# Altium PCB TestBoard_Rev13.PcbDoc
Units mil, origin at the board's own origin, x right, y up, seen from the top; angles counter-clockwise.
Board outline 2110 x 1040 mil, 2 copper layers (Top Layer, Bottom Layer), stack 31.8 mil thick; 62 components, 41 nets, 254 pads, 82 vias.
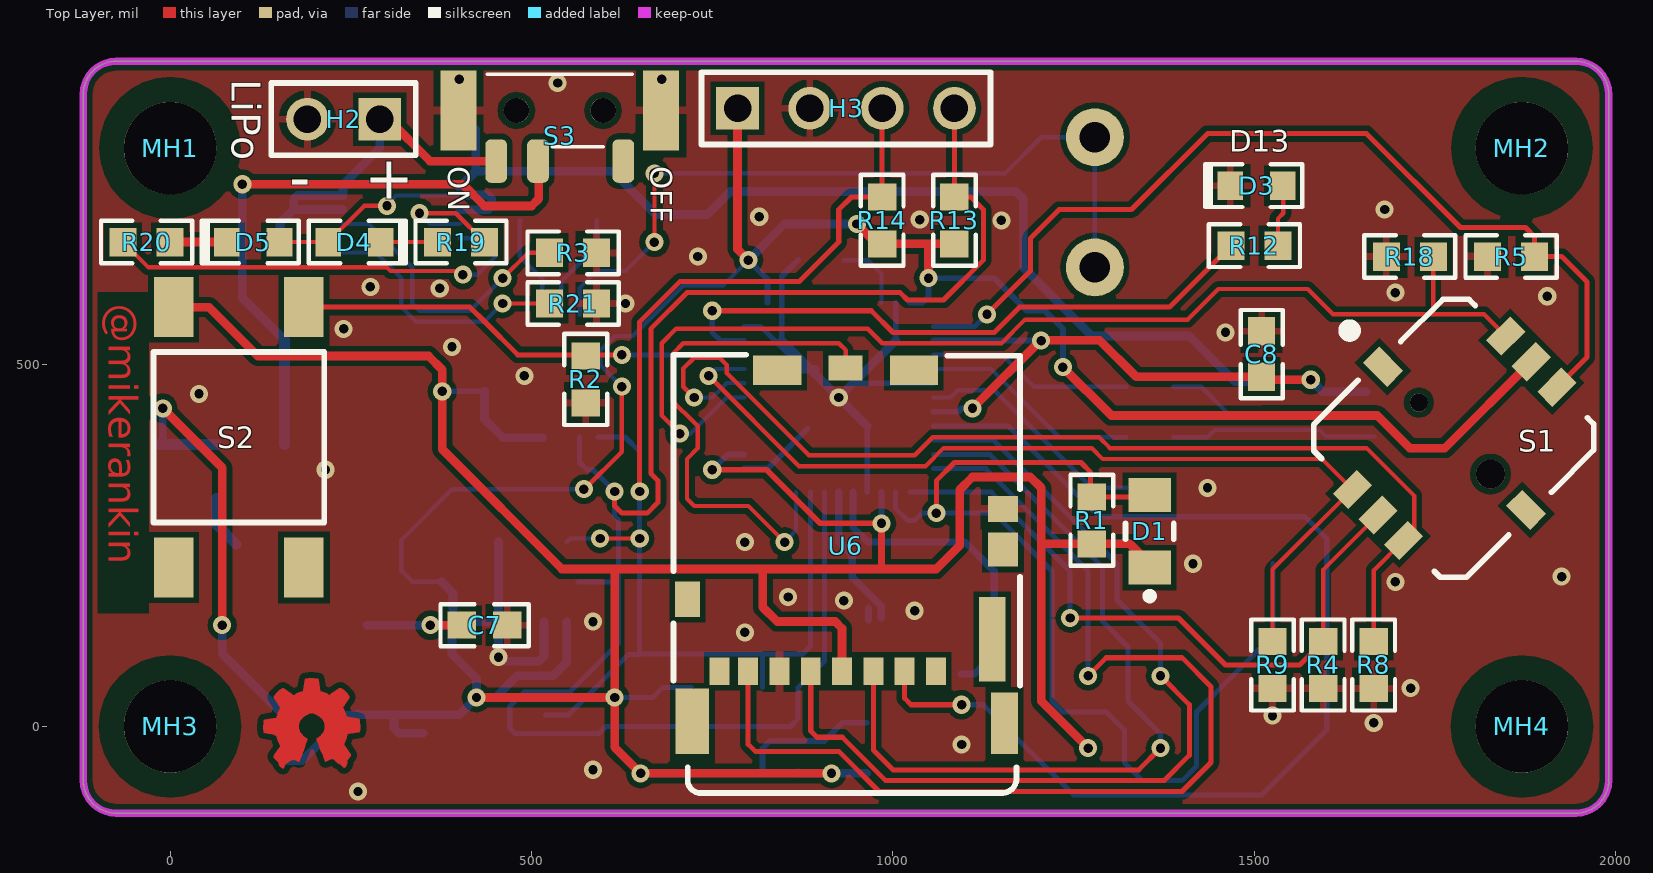
[diagram p0: Top Layer view]
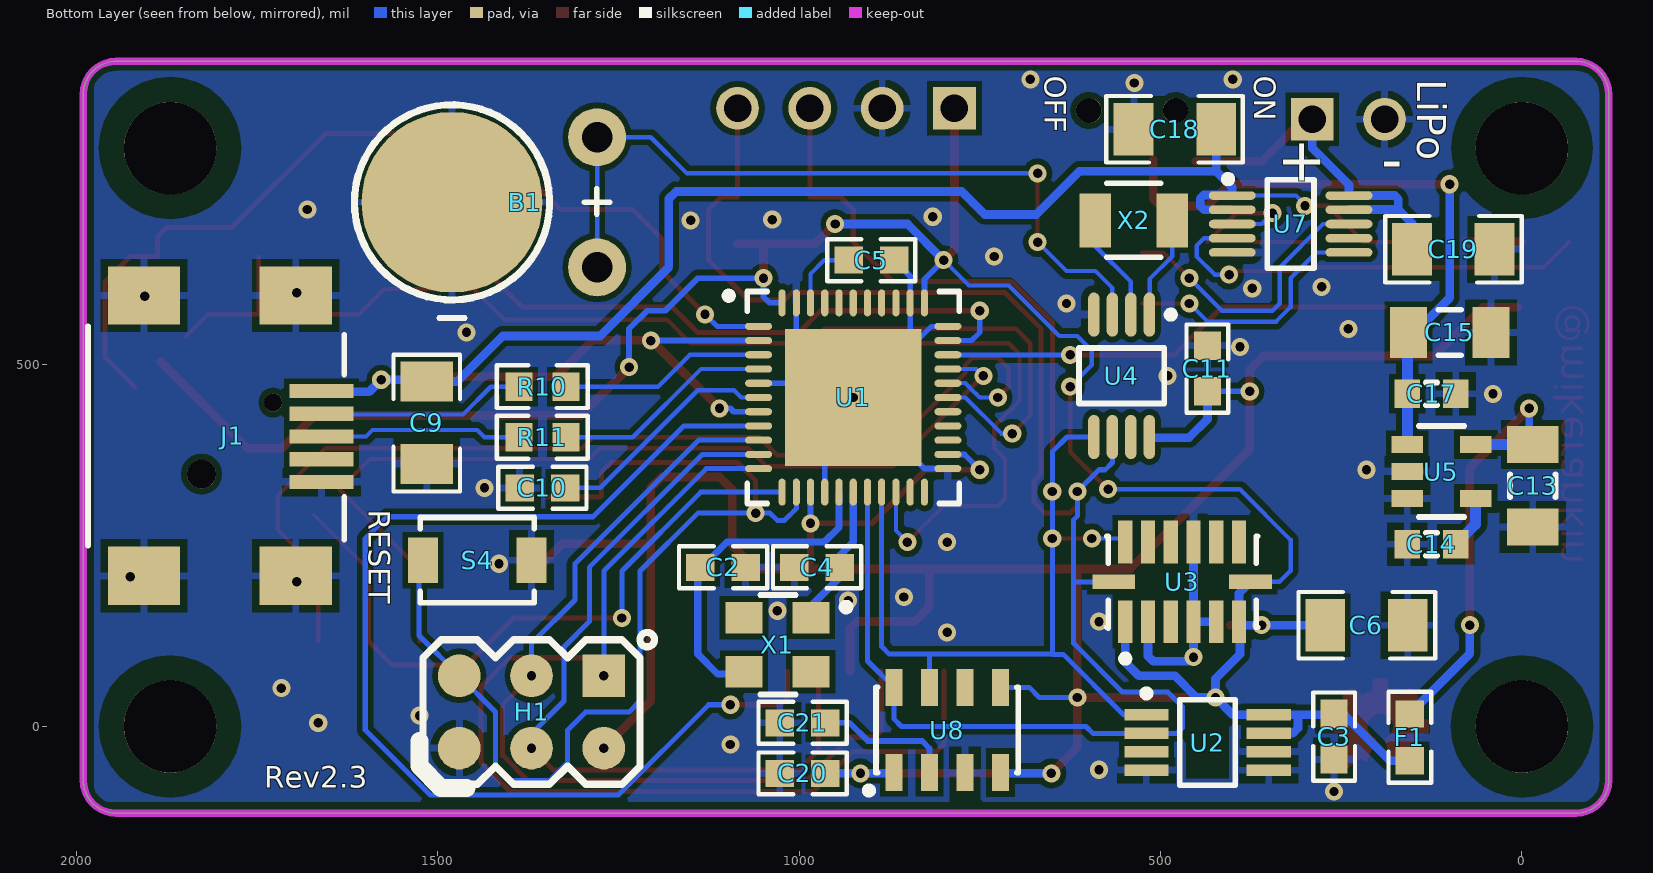
[diagram p1: Bottom Layer view, seen from below]
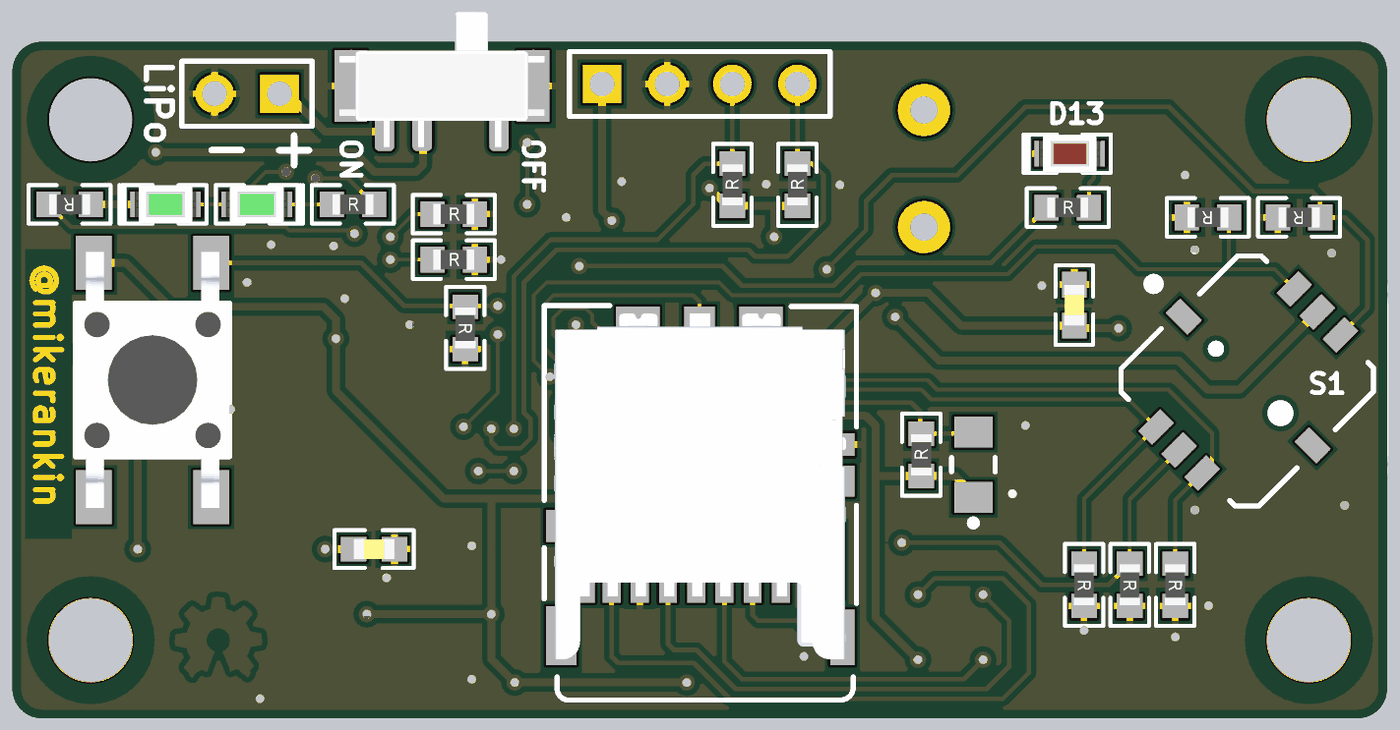
[diagram p2: 3D render of the assembled board from above, using the file's embedded part models]
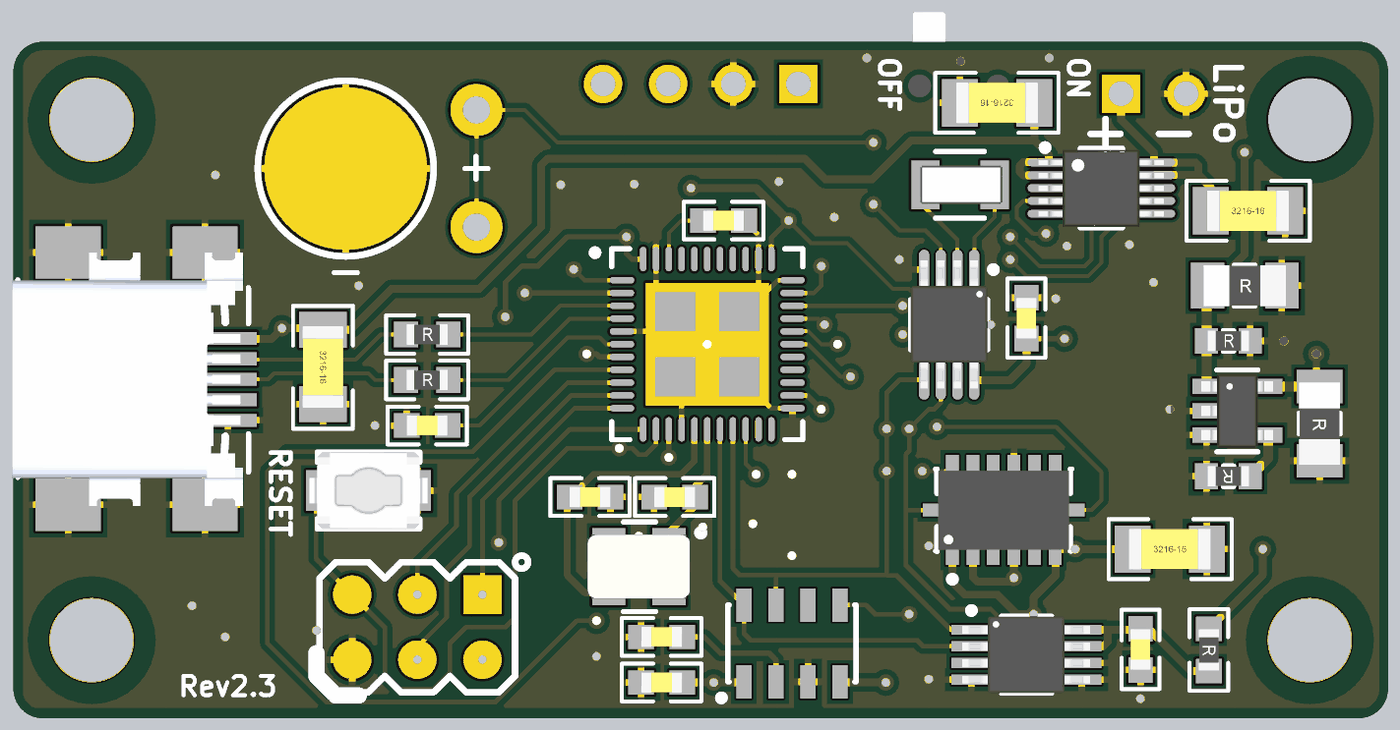
[diagram p3: 3D render of the assembled board from below, using the file's embedded part models]

## Layer stack, top to bottom
Top Solder: solder mask 0.4, Solder Resist, Dk 3.5
Top Layer: signal copper 1.4
Dielectric1: core 29, FR-4, Dk 4.8
Bottom Layer: signal copper 1.4
Bottom Solder: solder mask 0.4, Solder Resist, Dk 3.5

## Board outline
-120,-75 -120,875 cw(c-75,875) -75,920 1945,920 cw(c1945,875) 1990,875 1990,-75 cw(c1945,-75) 1945,-120 -75,-120 cw(c-75,-75)

## Design rules (kind name [scope] priority, off if disabled: settings)
Clearance Clearance_TSSOP [HasFootprint('TSSOP50P490X110-10N')] p1: gap=7.5
Clearance [All] p2: gap=8
HoleSize [All] p1: absolutevalues=TRUE maxlimit=130 minlimit=1 maxpercent=80.000 minpercent=20.000
MinimumSolderMaskSliver [All] p1 off: minsoldermaskwidth=5
PlaneConnect "Via No Relief" [(Isvia)] p1: planeconnectstyle=Direct reliefexpansion=20 reliefentries=4 reliefconductorwidth=10 reliefairgap=10
PlaneConnect [All] p2: planeconnectstyle=Relief reliefexpansion=20 reliefentries=4 reliefconductorwidth=10 reliefairgap=10
PolygonConnect Via_No_Relief [(IsVia)] p1: connectstyle=Direct reliefconductorwidth=10 reliefentries=4 polygonreliefangle="90 Angle" airgapwidth=10
PolygonConnect [All] p2: connectstyle=Relief reliefconductorwidth=10 reliefentries=4 polygonreliefangle="90 Angle" airgapwidth=10
RoutingVias [All] p1: holewidth=13 width=25 viastyle="Through Hole" minholewidth=13 minwidth=25 maxholewidth=13 maxwidth=25
SilkToSilkClearance [All] p1: silktosilkclearance=7
SilkToSolderMaskClearance SilkscreenOverComponentPads [IsPad] p1 off: minsilkscreentomaskgap=10 clearancetoexposedcopper=TRUE
SolderMaskExpansion [All] p1: expansion=4
Width [All] p1: maxlimit=50 minlimit=6 preferedwidth=7 minimp=50.000000 maximp=50.000000 favimp=50.000000
24 further rules are at their usual default settings.

## Components (designator, comment, footprint, x,y, rotation, side; value= is the part's Value field where it differs from the comment)
B1 "CR377" "CR377 Mount" 1480,725 r0 bottom
C2 "18pF" CAPC1608X90N 1105,220 r0 bottom
C3 "0.1uF" CAPC1608X90N 259.84,-14.13 r270 bottom
C4 "18pF" CAPC1608X90N 975,220 r180 bottom
C5 "0.1uF" CAPC1608X90N 900,645 r180 bottom
C6 "10uF" CAPC3216X160N 215,140 r180 bottom
C7 "0.1uF" CAPC1608X90N 435,140 r0 top
C8 "0.1uF" CAPC1608X90N 1510,515 r90 top
C9 "10uF" CAPC3216X160N 1515,420 r270 bottom
C10 "1uF" CAPC1608X90N 1355,330 r0 bottom
C11 "0.1uF" CAPC1608X90N 435,495 r90 bottom
C13 "CAP_1206" CHIP_3216N -15,332.91 r270 bottom
C14 "0.1uF" CHIP_1608N 125,252 r0 bottom
C15 "CAP_1206" CHIP_3216N 100,545 r180 bottom
C17 "0.1uF" CHIP_1608N 125,460 r180 bottom
C18 "4.7uF" CAPC3216X160N 480,826 r0 bottom
C19 "4.7uF" CAPC3216X160N 95,660 r180 bottom
C20 "0.1uF" CAPC1608X90N 995,-65 r0 bottom
C21 "1uF" CAPC1608X90N 995,5 r0 bottom
D1 "CD1206-S01575" BOUR-CD1206-S01575-2_L 1355,269.8 r270 top
D3 "Amber LED" LED1608X55N-RED 1503,748 r0 top
D4 "LED_0603" LED1608X55N-GREEN 255,670 r180 top
D5 "LED_0603" LED1608X55N-GREEN 115,670 r0 top
F1 "300mA Fuse" RESC1608X55N 155,-15 r270 bottom
H1 "CON3X2" HDR3X2 1370,20 r0 bottom
H2 "TSW-102-07-L-S" HDR1X2 240,840 r180 top
H3 "CON4" HDR1X4-Empty 935,855 r0 top
J1 "USB_DX" USB_DX 1766,401 r180 bottom
MH1 "Mounting Hole" "MH - 128mil Hole, 250mil Pad"#1 0,800 r0 top
MH2 "Mounting Hole" "MH - 128mil Hole, 250mil Pad"#2 1870,800 r0 top
MH3 "Mounting Hole" "MH - 128mil Hole, 250mil Pad"#2 0,0 r0 top
MH4 "Mounting Hole" "MH - 128mil Hole, 250mil Pad"#2 1870,0 r0 top
R1 "10K" RESC1608X55N 1275,285 r90 top
R2 "10K" RESC1608X55N 575,480 r270 top
R3 "10K" RESC1608X55N 557.48,655 r0 top
R4 "10K" RESC1608X55N 1595,85 r270 top
R5 "10K" RESC1608X55N 1855,650 r180 top
R8 "10K" RESC1608X55N 1665,85 r270 top
R9 "10K" RESC1608X55N 1525,85 r270 top
R10 "22R" RESC1608X55N 1355,470 r180 bottom
R11 "22R" RESC1608X55N 1355,400 r180 bottom
R12 "1K" RESC1608X55N 1500,665 r0 top
R13 "4.7K" RESC1608X55N 1085,700 r90 top
R14 "4.7K" RESC1608X55N 985,700 r90 top
R18 "10K" RESC1608X55N 1715,650 r180 top
R19 "470R" RESC1608X55N 402.48,670 r0 top
R20 "470R" RESC1608X55N -32.48,670 r180 top
R21 "1K" RESC1608X55N 557.48,585 r0 top
S1 "Navigation Switch" "NAVIGATION - DX" 1775,400 r0 top
S2 "Tactile_Switch" FSM6JSMA 95,400 r0 top
S3 "" SLIDE_SWITCH_DX 539,852 r180 top
S4 "TL1015AF160QG" TL1015AF160QG 1445,230 r0 bottom
U1 "ATmega32U4" VQFN-44 925,455 r180 bottom
U2 "TMP75AIDGKR" "MSOP-8N - NOPAD" 434.84,-22.32 r180 bottom
U3 "ADXL345BCCZ-RL7" LGA80P300X500X100-14N 470,200 r90 bottom
U4 "DS1340Z-33+" TSOP65P490X110-8N 553.7,485 r270 bottom
U5 "TPS79133DBVR" SOT95P280X144-5N 111.24,352.6 r180 bottom
U6 "Micro SD Connector" 5040771891 935,250 r180 top
U7 "MCP73833-FCI/UN" TSSOP50P490X110-10N 320,695 r180 bottom
U8 "MPL115A2" 8-LGA 795,-5 r90 bottom
X1 "16Mhz" OSC320X250X75-4N 1030,113 r270 bottom
X2 "ECS-.327-12.5-34B" ECS-.327-12.5-34B 535,700 r0 bottom

## Footprints (in the part's own frame and the unit in brackets; to place one, negate y for a bottom-side part, rotate by r counter-clockwise, add the part's x,y. Pads: shape width x height; smd on the part's side, far side on the other; paste and mask are expansions set on the pad)
8-LGA [mm] "LGA, 8-Pins"
  rect 1.3x0.6 smd mask+0.076: 1(-1.5,1.875) 2(-1.5,0.625) 3(-1.5,-0.625) 4(-1.5,-1.875) 5(1.5,-1.875) 6(1.5,-0.625) 7(1.5,0.625) 8(1.5,1.875)
  silkscreen extent -2.25,-2.5 1.5,2.88
5040771891 [mm] "CONN MICRO SD CARD PUSH-PULL SMD"
  rect 0.7x0.95 smd: 1(-3.162,4.413) 2(-2.062,4.413) 3(-0.962,4.413) 4(0.138,4.413) 5(1.238,4.413) 6(2.338,4.413) 7(3.438,4.413) 8(4.438,4.413)
  rect 1.2x0.88 smd: 9(0.013,-6.237)
  rect 0.95x2.17 smd: ""(-5.562,6.238)
  rect 1.05x0.9 smd: ""(-5.512,-1.287)
  rect 1.05x1.2 smd: ""(-5.512,0.138)
  rect 0.93x2.97 smd: ""(-5.137,3.288)
  rect 1.7x1.03 smd: ""(-2.387,-6.162) ""(2.413,-6.162)
  rect 1.19x2.3 smd: ""(5.401,6.172)
  rect 0.88x1.25 smd: ""(5.563,1.888)
  silkscreen extent -6.11,-6.71 6.06,8.69, body extent -5.71,-6.4 5.68,7.1, height 1.41
BOUR-CD1206-S01575-2_L [mm] "Molded Diode, 2-Leads, Body 3.4x1.7mm, IPC High Density"
  rect 1.2x1.5 smd: 1(-1.275,0) 2(1.275,0)
  silkscreen extent -0.28,-0.85 2.4,0.85, body extent -1.7,-0.85 1.7,0.85, height 0.95
CAPC1608X90N [mm] "Chip Capacitor, 2-Leads, Body 1.6x0.8mm, IPC Medium Density (0603)"
  rect 1x0.95 smd: 1(-0.8,0) 2(0.8,0)
  silkscreen extent -1.55,-0.74 1.55,0.74, body extent -0.8,-0.4 0.8,0.4, height 0.79
CAPC3216X160N [mm] "Chip Capacitor, 2-Leads, Body 3.2x1.6mm, IPC Medium Density(C1206)"
  rect 1.4x1.85 smd: 1(-1.45,0) 2(1.45,0)
  silkscreen extent -2.39,-1.17 2.41,1.17, body extent -1.6,-0.8 1.6,0.8, height 1.89
CHIP_1608N [mm] "Chip  Body 1.6x0.8mm, IPC Medium Density (0603)"
  rect 0.9x1 smd: 1(-0.85,0) 2(0.85,0)
  silkscreen extent -0.2,-0.4 0.2,0.4, body extent -0.8,-0.4 0.8,0.4, height 0.55
CHIP_3216N [mm] "Chip  Body 3.2x1.6mm, IPC Medium Density (1206)"
  rect 1.3x1.8 smd: 1(-1.45,0) 2(1.45,0)
  silkscreen extent -0.4,-0.8 0.4,0.8, body extent -1.6,-0.8 1.6,0.8, height 0.65
"CR377 Mount" [mil] "CR377 Mount"
  round 80 hole 42: 1(-200.73,-90) 1(-200.73,90)
  round 250 smd paste-200: 2(0,0)
  silkscreen extent -218,-135 135,160
ECS-.327-12.5-34B [mm] "SMT Crystal, 2-Leads, Body 3.2x1.5mm, IPC Medium Density"
  rect 1.1x1.9 smd: 1(-1.3,0) 2(1.4,0)
  silkscreen extent -0.9,-1.3 1,1.3, body extent -1.6,-0.75 1.6,0.75, height 0.91
FSM6JSMA [mil] "SWITCH TACTILE SPST-NO 0.05A 12V"
  rect 55.12x82.68 smd: 1(90,180) 2(90,-180) 3(-90,180) 4(-90,-180)
  silkscreen extent -118,-118 118,118, body extent -118,-197 118,197, height 276
HDR1X2 [mm]
  rect 1.5x1.5 hole 0.965: 1(-1.27,0)
  round 1.5 hole 0.965: 2(1.27,0)
  silkscreen extent -2.54,-1.27 2.54,1.27
HDR1X4-Empty [mm]
  rect 1.5x1.5 hole 0.965: 1(-3.81,0)
  round 1.5 hole 0.965: 2(-1.27,0) 3(1.27,0) 4(3.81,0)
  silkscreen extent -5.08,-1.27 5.08,1.27
HDR3X2 [mm]
  rect 1.5x1.5 smd paste-0.762: 1(-2.54,-1.27)
  round 1.5 smd paste-0.762: 2(-2.54,1.27) 3(0,-1.27) 4(0,1.27) 5(2.54,-1.27) 6(2.54,1.27)
  silkscreen extent -4.32,-2.79 3.81,2.54
LED1608X55N-GREEN [mm] "Chip LED GREEN 2-Leads, Body 1.6x0.8mm, IPC Medium Density (0603 med)"
  rect 0.9x1 smd: 1(-0.925,0) 2(0.925,0)
  silkscreen extent -1.8,-0.75 1.6,0.75, body extent -1.2,-0.75 1.2,0.75, height 1.4
LED1608X55N-RED [mm] "Chip LED RED, 2-Leads, Body 1.6x0.8mm, IPC Medium Density (0603 med)"
  rect 0.9x1 smd: 1(-0.925,0) 2(0.925,0)
  silkscreen extent -1.8,-0.75 1.6,0.75, body extent -1.2,-0.75 1.2,0.75, height 1.4
LGA80P300X500X100-14N [mm] "LGA, 14-Pins, Body 3.2x5.2mm (max), Pitch 0.80mm, IPC Medium Density"
  rect 1.5x0.5 smd mask+0.076: 1(-1.399,2) 2(-1.399,1.2) 3(-1.399,0.4) 4(-1.399,-0.4) 5(-1.399,-1.2) 6(-1.399,-2) 8(1.401,-2) 9(1.401,-1.2) 10(1.401,-0.4) 11(1.401,0.4) 12(1.401,1.2) 13(1.401,2)
  rect 0.5x1.5 smd mask+0.076: 7(0.001,-2.4) 14(0.001,2.4)
  silkscreen extent -2.82,-2.65 1.6,2.65, body extent -1.55,-2.55 1.55,2.55, height 1
"MH - 128mil Hole, 250mil Pad"#1 [mil] "Mounting Hole-128mil Hole, 250mil Pad"
  round 128 hole 128 unplated paste-19.68 mask+3: ""(0,0)
"MH - 128mil Hole, 250mil Pad"#2 [mil] "Mounting Hole-128mil Hole, 250mil Pad"
  round 128 hole 128 paste-19.68 mask+3: ""(0,0)
"MSOP-8N - NOPAD" [mm]
  rect 1.55x0.4 smd mask+0.076: 1(-2.15,0.975) 2(-2.15,0.325) 3(-2.15,-0.325) 4(-2.15,-0.975) 5(2.15,-0.975) 6(2.15,-0.325) 7(2.15,0.325) 8(2.15,0.975)
  silkscreen extent -2.28,-1.5 0.98,1.85, body extent -2.51,-1.5 2.49,1.5, height 1.1
"NAVIGATION - DX" [mm] "Navigation Switch - DX"
  rect 1.2x0.762 smd rot 45: 1(-3.542,-1.834) 2(-2.644,-2.732) 3(-1.746,-3.63) 4(3.642,1.758) 5(2.744,2.656) 6(1.846,3.554)
  rect 0.8x1.2 smd rot 45: ""(-2.464,2.477) ""(2.564,-2.552)
  round 0.635 hole 0.635 unplated mask-0.102: ""(-1.207,1.219)
  round 1.016 hole 1.016 unplated mask-0.102: ""(1.307,-1.295)
  silkscreen extent -4.9,-4.92 4.93,4.84
OSC320X250X75-4N [mm] "Crystal 3.20mm x 2.50mm 1.0mm height"
  rect 1.1x1.3 smd: 1(-0.95,1.175) 2(-0.95,-1.175) 3(0.95,-1.175) 4(0.95,1.175)
  silkscreen extent -1.75,-0.6 1.75,2.54, body extent -1.25,-2 1.25,2, height 0.75
RESC1608X55N [mm] "Chip Resistor, 2-Leads, Body 1.6x0.8mm, IPC Medium Density (0603 med)"
  rect 0.95x1 smd: 1(-0.825,0) 2(0.825,0)
  silkscreen extent -1.6,-0.75 1.6,0.75, body extent -0.8,-0.4 0.8,0.4, height 0.54
SLIDE_SWITCH_DX [mil] "Slide Switch DX"
  rrect50% 30x60 smd: 1(88,70) 2(30,70) 3(-88,70)
  rect 50x110 smd: 4(-140,0) 5(140,0)
  round 35 hole 35 unplated: ""(-60,0) ""(60,0)
  silkscreen extent -100,-50 100,50, body extent -157,-114 158,94, height 60
SOT95P280X144-5N [mm] "SOT23, 5-Leads, Body 3.1x3.0mm (max), Pitch 0.95mm, IPC Medium Density (RFMD SOT23-5)"
  rect 1.1x0.6 smd: 1(-1.2,0.95) 2(-1.2,0) 3(-1.2,-0.95) 4(1.2,-0.95) 5(1.2,0.95)
  silkscreen extent -0.8,-1.6 0.8,1.6, body extent -1.4,-1.45 1.4,1.45, height 1.45
TL1015AF160QG [mm] "SWITCH TACTILE SPST-NO 0.05A 12V"
  rect 1.05x1.59 smd: 1(-1.905,0) 2(1.905,0)
  silkscreen extent -2,-1.5 2,1.5, body extent -2.3,-1.5 2.3,1.5, height 2
TSOP65P490X110-8N [mm] "TSOP, 8-Leads, Body 3.0x3.0mm (max), Pitch 0.65mm, IPC Medium Density"
  oval 1.55x0.4 smd mask+0.076: 1(-2.15,0.975) 2(-2.15,0.325) 3(-2.15,-0.325) 4(-2.15,-0.975) 5(2.15,-0.975) 6(2.15,-0.325) 7(2.15,0.325) 8(2.15,0.975)
  silkscreen extent -2.27,-1.5 0.97,1.85, body extent -2.51,-1.5 2.49,1.5, height 1.1
TSSOP50P490X110-10N [mm] "TSSOP, 10-Leads, Body 3.1x3.1mm (max), Pitch 0.50mm, IPC Medium Density(10MSOP)"
  oval 1.65x0.3 smd: 1(-2.05,1) 2(-2.05,0.5) 3(-2.05,0) 4(-2.05,-0.5) 5(-2.05,-1) 6(2.05,-1) 7(2.05,-0.5) 8(2.05,0) 9(2.05,0.5) 10(2.05,1)
  silkscreen extent -2.32,-1.55 0.82,1.7, body extent -2.45,-1.51 2.43,1.49, height 1.04
USB_DX [mm] "CONN RECEPT MINIUSB R/A 5POS SMD"
  rect 2.25x0.5 smd: 1(2.675,1.6) 2(2.675,0.8) 3(2.675,0) 4(2.675,-0.8) 5(2.675,-1.6)
  rect 2.54x2.05 smd: ""(-3.556,-4.897) ""(-3.556,4.953) ""(1.778,-4.894) ""(1.778,4.953)
  silkscreen extent -5.53,-3.82 3.47,3.88, body extent -5.74,-4.95 3.26,4.95, height 4.05
VQFN-44 [mm]
  oval 0.95x0.25 smd: 1(-3.325,2.5) 2(-3.325,2) 3(-3.325,1.5) 4(-3.325,1) 5(-3.325,0.5) 6(-3.325,0) 7(-3.325,-0.5) 8(-3.325,-1) 9(-3.325,-1.5) 10(-3.325,-2) 11(-3.325,-2.5) 23(3.325,-2.5) 24(3.325,-2) 25(3.325,-1.5) 26(3.325,-1) 27(3.325,-0.5) 28(3.325,0) 29(3.325,0.5) 30(3.325,1) 31(3.325,1.5) 32(3.325,2) 33(3.325,2.5)
  oval 0.25x0.95 smd: 12(-2.5,-3.325) 13(-2,-3.325) 14(-1.5,-3.325) 15(-1,-3.325) 16(-0.5,-3.325) 17(0,-3.325) 18(0.5,-3.325) 19(1,-3.325) 20(1.5,-3.325) 21(2,-3.325) 22(2.5,-3.325) 34(2.5,3.325) 35(2,3.325) 36(1.5,3.325) 37(1,3.325) 38(0.5,3.325) 39(0,3.325) 40(-0.5,3.325) 41(-1,3.325) 42(-1.5,3.325) 43(-2,3.325) 44(-2.5,3.325)
  rect 4.8x4.8 smd paste-2.5: 45(0,0)
  silkscreen extent -4.5,-3.72 3.73,3.73, body extent -3.57,-3.57 3.58,3.58, height 1

## Part data
B1: "Custom CR377 mount"
C2 C4: library part CAP_0603, "CAP CER 18pF 0603"
C3 C5 C7 C11: library part CAP_0603, "CAP CER 0.1uF 0603"
C6 C9: library part GRM31CR61E106KA12L, "CAP CER 10UF 25V 10% X5R 1206"
C8 C20 C21: library part CAP_0603, "CAP 0603"
C10: library part CAP_0603, "CAP CER 1uF 0603"
C13 C15: "CAP CER 4.7uF, 1206"
C14 C17: library part CAP_0603, "CAP CER 0.1uF, 0603"
C18 C19: library part CAP_1206, "CAP CER 4.7uF, 1206"
D1: library part CMP-0583-00001-2, "75 V Small Signal Switching Diode, 150 mA, 2.5 uA, 1026 Molded Package, RoHS, Tape and Reel"
D3: library part LED_0603, "LED_0603"
F1: library part MF-FSMF010X-2, "FUSE .3A 125V FAST NANO2 SMD"
H1: "CONN HEADER 3X2POS .100\" PADS"
H2: "CONN HEADER 2POS .100\" SGL GOLD"
H3: "CONN HEADER 4POS .100\" PADS"
J1: "CONN RECEPT MINIUSB R/A 5POS SMD"
R1 R2 R3 R4 R5 R8 R9 R13 R14 R18: library part RES_0603, "RES 10K 0603"
R10 R11: library part RES_0603, "RES 33R 0603"
R12 R21: library part RES_0603, "RES 1K 0603"
R19 R20: library part RES_0603
S1: library part NAV-DX, "Navigation Switch - DX"
S2: library part FSM6JSMA, "SWITCH TACTILE SPST-NO 0.05A 12V"
S3: library part DX_SLIDE_SWITCH, "DX_SWITCH SLIDE SPDT R/A"
S4: "SWITCH TACTILE SPST-NO 0.05A 12V"
U1: "MCU AVR 32K FLASH 16MHZ 44-TQFP"
U2: "IC DGTL TEMP SENSOR 2WIRE 8-MSOP"
U3: "IC ACCEL SPI/I2C 3AX 14LGA"
U4: "IC RTC SERIAL 512K 8-TSSOP"
U5: "IC REG LDO 3.3V 0.1A SOT23-5"
U6: library part 5040771891, "CONN MICRO SD CARD PUSH-PULL SMD"
U7: "IC LI-ION/LI-POLY CTRLR 10MSOP"
U8: "IC BAROMETER I2C DGTL MINI 8-LGA"
X1: library part ABM8-16.000MHZ-B2-T, "CRYSTAL 16.000MHZ 18PF SMD"
X2: "CRYSTAL 32.768 KHZ 12.5PF SMD"

## Free pads (board coordinates)
  round 180 on Keep-Out: ""(0,0) ""(0,800) ""(1870,0) ""(1870,800)

## Via types
v1: diameter 25, hole 13, Top Layer to Bottom Layer, tented both sides, 82 vias

## Nets (pads, with @x,y where several pads share a name; then routed paths per layer and width w, separated by ;. In a path a pad name is that pad's centre, name@x,y a point inside that pad or via, vN(x,y) a via of type N, cw(c..) or ccw(c..) an arc to the next point about the centre after c; other vN are vias at no path point)
GND: B1.2 C2.1 C3.2 C4.1 C5.2 C6.2 C7.2 C8.2 C9.2 C10.2 C11.2 C13.2 C14.2 C15.2 C17.2 C18.2 C19.2 C20.2 C21.2 D3.1 H1.6 H2.2 H3.2 J1. J1.5 R2.2 R3.2 R4.2 R5.2 R8.2 R9.2 R18.2 R21.2 S3.4 S3.5 S4.1 U1.5 U1.15 U1.23 U1.33 U1.35 U1.43 U1.45 U2.4 U2.5 U2.6 U3.2 U3.4 U3.5 U3.10 U4.4 U5.2 U5.3 U6.6 U6.@1152.03,300.69 U7.5 U8.3 | length 1193.7
  Bottom Layer w7: U1.33 816.58,553.42 U1.45@876,494
  Bottom Layer w8: U1.23 826.57,356.57 U1.45@881.69,411.69 ; U1.45@846.26,533.74 U1.35 846.26,622.76 C5.2 ; U1.45@944.68,474.68 U1.5 ; U1.15 U1.45@964.37,415.63 ; U1.45@1003.74,533.74 U1.43
  Bottom Layer w12: U3.5 U3.4 ; U3.10 U3.4 ; U3.2 517.24,97.24 510,90 460,90 v1(454.25,95.75) U3.4 ; U1.45@846.26,533.74 U1.45@886,494 ; U1.45@876,494 U1.45@886,494 ; U1.45@892,494 U1.45@886,494 ; U1.45@964.37,415.63 v1(925,455) ; U1.45@1003.74,533.74 944.68,474.68 v1(925,455) ; U1.45@886,494 v1(925,455)
  other v1: 260,-90 585,-60 1095,-25 1665,5 1525,15 1716,53 795,130 585,145 1030,160 932,174 855,179 1695,200 1925,207.2 1415,225 795,255 1435,330 215,355 40,460 490,485 390,525 1460,545 240,550 630,585 1905,595 1695,600 373,606 277,608 730,650 1150,700 1037,701 815,705 1680,715 536,890 400,895 680,895
NetB1_1: B1.1 U4.3 | length 1071.6
  Top Layer w6: v1(670,670) v1(670,765)
  Bottom Layer w6: U4.3 566.49,606.49 590,630 630,630 v1(670,670) ; v1(670,765) 1155,765 1205,815 1279.27,815 B1.1@1279.27,635
NetC2_2: C2.2 U1.16 X1.3 | length 469.9
  Bottom Layer w10: U1.16 944.68,275.31 ; X1.3@1093.98,72.6 1112.6,72.6 1140,100 1140,214.5 1136.5,218 1099.49,255 1050,255 965,255 ; 944.68,275.31 965,255 ; 944.68,275.31 965,255
NetC4_2: C4.2 U1.17 X1.1 | length 214.6
  Bottom Layer w10: U1.17 925,255 943.5,236.5 C4.2 943.5,206.5 983.74,166.26 X1.1 ; X1.1@966.02,147.4 X1.1@966.02,163.98
NetC5_1: C5.1 U1.42 | length 100.5
  Bottom Layer w6: C5.1 965,645 984.06,625.94 U1.42
NetC10_1: C10.1 U1.6 | length 327.7
  Bottom Layer w6: U1.6 1080,455 1090,465 1140,465 1275,330 C10.1
NetC13_1: C13.1 F1.1 U5.5 | length 621.9
  Top Layer w12: v1(-10,440) 72.09,357.91 v1(72.09,140)
  Bottom Layer w10: C13.1 -10,395 v1(-10,440)
  Bottom Layer w12: v1(72.09,140) 72.09,100.39 F1.1
  Bottom Layer w15: C13.1 U5.5
NetC14_1: C14.1 U5.4 | length 74.6
  Bottom Layer w15: U5.4 64,279.54 C14.1
NetC15_1: C15.1 C17.1 S3.2 U5.1 | length 864.8
  Top Layer w12: v1(100,750) 405,750 435,720 500,720 510,730 S3.2@510,784
  Bottom Layer w12: v1(100,750) 100,593.09 158.09,535 C15.1@158.49,534.6
  Bottom Layer w15: U5.1 C15.1@158.49,534.6
NetC19_1: C19.1 H2.1 S3.1 U7.9 U7.10 | length 527.6
  Top Layer w12: H2.1 301.65,840 359.65,782 S3.1
  Bottom Layer w6: U7.9@238.98,715 U7.9
  Bottom Layer w12: C19.1 152.09,696.09 171,715 ; U7.9@238.98,715 171,715 ; H2.1 290,800 239.29,749.29 U7.10 176.1,734.37 171,729.27 171,715
NetC21_1: C21.1 U8.2 | length 192.2
  Bottom Layer w8: U8.2 819.61,-30.39 830,-20 905,-20 930,5 C21.1
NetD1_1: D1.1 H1.5 R1.2 S4.2 U1.13 | length 1453.7
  Top Layer w7: v1(1060,295) 1060,340 1085,365 1260,365 1273.5,351.5 1273.5,318.98 R1.2 D1.1@1352.48,317.48
  Bottom Layer w7: U1.13 1003.74,301.26 1020,285 1030,285 1040,295 v1(1060,295) 1140,295 1220,215 1220,35 1235,20 1295,20 1320,-5 1320,-50 1345,-75 1400,-75 1420,-55 1420,20 H1.5 1525.71,125.71 S4.2@1525.71,225
NetD3_2: D3.2 R12.2 | length 86.4
  Top Layer w6: R12.2 1532.48,702.48 1540,710 1540,747.42 D3.2
NetD4_1: D4.1 R19.1 | length 78.6
  Top Layer w6: D4.1 R19.1
NetD5_1: D5.1 R20.1 | length 78.6
  Top Layer w12: R20.1 D5.1
NetH1_1: H1.1 U1.11 U6.7 | length 1504.7
  Top Layer w7: U6.7 799.67,-24.67 810,-35 925.58,-35 980.78,-90.2 1399.8,-90.2 1440,-50 1440,55 1400,95 1295,95 v1(1270,70)
  Bottom Layer w7: U1.11 1128.43,356.57 1270,215 v1(1270,70)
NetH1_3: H1.3 U1.9 U6.5 | length 1280.6
  Top Layer w7: U6.5 886.28,-6.28 895,-15 930,-15 990,-75 1375,-75 1410,-40 1410,30 v1(1370,70)
  Bottom Layer w7: U1.9 1139.06,395.94 1310,225 1310,175 1370,115 v1(1370,70)
NetH1_4: H1.4 U1.10 U6.3 | length 1111.9
  Top Layer w7: U6.3 972.89,-32.89 1000,-60 1340,-60 v1(1370,-30)
  Bottom Layer w7: U1.10 1133.74,376.26 1290,220 1290,145 1325,110 1325,35 1370,-10 v1(1370,-30)
NetH3_3: H3.3 R14.2 U1.19 U2.1 U3.13 U4.5 U8.7 | length 1904.3
  Top Layer w6: v1(595,260) v1(649.65,260)
  Top Layer w7: v1(649.65,325) 649.65,559.65 705.63,615.63 870.63,615.63 925,670 925,715 942.48,732.48 R14.2 H3.3
  Bottom Layer w6: U3.13 553.57,260 v1(595,260)
  Bottom Layer w7: U2.1 551.07,16.07 634.65,99.65 649.65,99.65 649.65,100 ; U4.5 629.29,400.35 649.65,380 v1(649.65,325) v1(649.65,260) 649.65,100 ; U8.7 819.61,100 ; U1.19 885.63,110.63 875,100 819.61,100 ; 649.65,100 819.61,100
NetH3_4: H3.4 R13.2 U1.18 U2.2 U3.14 U4.6 U8.8 | length 2404.6
  Top Layer w7: v1(615,325) 615,305 625,295 660,295 675,310 675,340 665,350 665,550 715,600 1010,600 1020,590 1070,590 1125,645 1125,715 1107.52,732.48 R13.2 H3.4
  Bottom Layer w7: U3.14 619.49,200.05 ; U4.6 566.49,365 576.49,355 585,355 v1(615,325) 615,290.78 620,285.78 620,115 552.68,47.68 489.84,47.68 469.84,27.68 469.84,-2.32 477.05,-9.53 U2.2 593.6,-9.53 603.12,0 858.24,0 868.82,10.58 U8.8 905.31,90.55 U1.18
NetJ1_2: J1.2 R10.1 | length 283.2
  Bottom Layer w6: R10.1 1426.5,470 1465,431.5 J1.2@1654.68,431.5
NetJ1_3: J1.3 R11.1 | length 286.1
  Bottom Layer w6: R11.1 1435,400 1445,410 1590,410 1599,401 J1.3@1665.69,401
NetR2_1: R2.1 S2.1 U1.31 | length 631.4
  Top Layer w7: S2.1@190,580 415,580 435,560 480.95,514.05 544.05,514.05 v1(625,514.05)
  Bottom Layer w7: v1(625,514.05) 755.94,514.05 U1.31
NetR3_1: R3.1 U7.8 | length 397.8
  Top Layer w6: v1(460,620) 495,655 R3.1
  Bottom Layer w6: U7.8 275,695 335,635 335,585 345,575 415,575 v1(460,620)
NetR4_1: R4.1 S1.2 U1.12 | length 928.5
  Top Layer w6: R4.1 1595,216.54 S1.2
  Top Layer w7: v1(1245,150) 1395,150 1460,85 1562.52,85 R4.1
  Bottom Layer w7: U1.12 1135.91,324.09 1245,215 v1(1245,150)
NetR5_1: R5.1 S1.4 U1.1 | length 1304.9
  Top Layer w7: v1(1130,570) 1190,630 1190,675 1230,715 1330,715 1435,820 1655,820 1785,690 1875,690 1887.48,677.52 R5.1 1925,650 1960,615 1960,510.83 S1.4
  Bottom Layer w7: U1.1 1113.42,553.42 v1(1130,570)
NetR8_1: R8.1 S1.3 U1.29 | length 1472.3
  Top Layer w6: v1(725,455) 710,470 710,495 725,510 760,510 770,500 770,488.7 883.7,375 1030,375 1055,400 1285,400 1300,385 1655,385 1721.24,318.76 1721.24,272.07 S1.3 1665,215.83 R8.1
  Bottom Layer w6: v1(725,455) 750,455 755,460 770,475 793.78,475 U1.29
NetR9_1: R9.1 S1.1 U1.30 | length 1285.5
  Top Layer w6: v1(745,485) 870,360 1045,360 1070,385 1275,385 1290,370 1593.35,370 S1.1 1525,217.25 R9.1
  Bottom Layer w6: v1(745,485) 754.37,494.37 U1.30
NetR10_2: R10.2 U1.3 | length 284.9
  Bottom Layer w6: U1.3 1150.95,514.05 1195,470 R10.2
NetR11_2: R11.2 U1.4 | length 305.7
  Bottom Layer w6: U1.4 1135.63,494.37 1230,400 R11.2
NetR12_1: R12.1 U1.32 | length 858.4
  Top Layer w7: v1(750,575) 970,575 1000,545 1140,545 1175,580 1382.52,580 R12.1
  Bottom Layer w7: v1(750,575) 750,545 761.26,533.74 U1.32
NetR18_1: R18.1 S1.6 U1.28 | length 1567.4
  Top Layer w6: v1(705,405) 680,430 680,530 700,550 965,550 985,530 1150,530 1182.74,562.74 1407.74,562.74 1450,605 1573.7,605 1608.7,570 1747.48,570 ; R18.1 1747.48,570 ; S1.6 1817.61,570 1747.48,570
  Bottom Layer w6: v1(705,405) 720,405 770,455 U1.28
NetR19_2: R19.2 U7.3 | length 168.5
  Top Layer w6: v1(345,710) 395.04,710 R19.2 R19.2
  Bottom Layer w6: v1(345,710) 360,695 U7.3
NetR20_2: R20.2 U7.4 | length 612.5
  Top Layer w6: R20.2 -29.96,635 300,635 305,630 400,630 v1(405,625)
  Bottom Layer w6: U7.4 439.68,675.31 450,665 450,650 425,625 v1(405,625)
NetR21_1: R21.1 U7.6 | length 359.1
  Top Layer w6: v1(460,585) R21.1
  Bottom Layer w6: U7.6 284.37,655.63 320,620 320,580 340,560 435,560 v1(460,585)
NetU1_8: U1.8 U6.2 | length 1587.5
  Top Layer w7: U6.2 1016.2,38.8 1025,30 v1(1095,30)
  Bottom Layer w7: U1.8 1159.37,415.63 1285,290 1570,290 1600,260 1600,-5 1510,-95 1250,-95 1125,30 v1(1095,30)
NetU1_20: U1.20 U6.9 | length 731.2
  Top Layer w6: v1(850,255) 800,305 725,305 715,315 715,370 730,385 730,415.62 710.62,435 710,435 695,450 695,515 710,530 925,530 934.51,520.49 U6.9
  Bottom Layer w6: v1(850,255) 865.94,270.94 U1.20
NetU4_1: U4.1 X2.1 | length 137.9
  Bottom Layer w6: X2.1 483.82,650.18 515,619 U4.1@515,575
NetU4_2: U4.2 X2.2 | length 150.7
  Bottom Layer w6: U4.2 540.9,615 590.12,664.21 X2.2
VCC: C3.1 C6.1 C7.1 C11.1 C20.1 D1.2 F1.2 H1.2 H3.1 R1.1 R13.1 R14.1 S1.5 S2.3 U1.14 U1.24 U1.34 U1.44 U2.7 U2.8 U3.1 U3.6 U3.7 U4.8 U6.4 U8.1 U8.4 U8.5 | length 7441.8
  Top Layer w6: v1@575,330 625,380 v1(625,470)
  Top Layer w8: v1(750,355) 824.86,355 898.92,280.94 v1(984.06,280.94) ; 1049.09,666.61 1050,667.52
  Top Layer w10: 984.06,217.76 v1(984.06,280.94)
  Top Layer w12: S2.3 53.74,580 121.26,512.48 357.52,512.48 376.5,493.5 v1(376.5,463.5) 376.5,383.5 542.24,217.76 615,217.76 ; v1(360,140) C7.1 ; v1(423.93,40) v1(615,40) ; H3.1 785,660 v1(800,645) ; v1(915,-65) v1(650.94,-65) 615,-29.06 v1(615,40) ; U6.4 929.59,135.41 920,145 840,145 820,165 820,217.76 ; v1(950,695) 977.48,667.52 1050,667.52 R13.1 ; v1(1049.09,620) 1049.09,666.61 ; v1(1235,497) 1301.74,430.26 ; v1(1270,-30) 1205,35 1205,250 ; 1301.74,430 1510,430 1670,430 1715,385 1763.46,385 S1.5 ; D1.2@1355,225 1327.48,252.52 R1.1 1207.52,252.52 1205,250 ; v1(615,40) 615,217.76 ; 615,217.76 820,217.76 ; 820,217.76 984.06,217.76 1059.73,217.76 1092.26,250.28 1092.26,327.26 1110,345 1190,345 1205,330 1205,250
  Bottom Layer w6: U3.7 335.38,200.05 320,215.42 320,258.02 390.13,328.15 v1(572.43,328.15) ; v1(625,470) 595,500 595,520 615,540 640,540 710,610 765,610 v1(800,645)
  Bottom Layer w7: v1(615,40) 667.52,40 681.57,54.06 U8.5
  Bottom Layer w8: v1(376.5,463.5) C11.1 ; v1(750,355) 771.26,376.26 U1.24 ; v1(800,645) 826.57,618.43 U1.34 ; v1(984.06,280.94) U1.14 ; U1.44 1040.91,585.91 1049.09,594.09 v1(1049.09,620) 1140,620 1185,575 1210,575 1235,550 v1(1235,497)
  Bottom Layer w12: F1.2 182.52,-47.48 245,15 257.48,15 C3.1 ; C3.1@259.84,16.07 309.07,16.07 ; C6.1 v1(360,140) 386.33,140 U3.6@390,143.67 ; U2.7 317.05,-9.53 309.84,-2.32 309.84,15.3 309.07,16.07 ; U3.7 391.26,184.3 U3.6 U3.6@390,143.67 ; C11.1 435,425 460.47,399.53 U4.8@515.31,399.53 ; U3.1 548.74,88.74 530,70 480,70 450,40 v1(423.93,40) ; v1@650,-63.11 v1@650.94,-64.06 ; v1(650.94,-65) U8.4@721.18,-65 ; v1(800,645) 850,695 v1(950,695) ; U8.1 869.76,-65 v1(915,-65) C20.1 ; 309.07,16.07 U2.8 400,16.07 v1(423.93,40) ; U3.6@390,143.67 390,100 423.93,66.07 v1(423.93,40)
VUSB: C8.1 C9.1 C18.1 D4.2 D5.2 J1.1 U1.2 U1.7 U7.1 U7.2 | length 2647.1
  Top Layer w6: D5.2 D4.2 268.58,720 v1(300,720)
  Top Layer w12: v1(1110,440) 1204.37,534.37 1285.63,534.37 1336.5,483.5 C8.1 1513.94,479.57 v1(1577.92,479.57)
  Bottom Layer w6: v1@305.31,727.18 312.5,734.37 U7.1
  Bottom Layer w8: U1.7 1090.31,435.31 1095,440 v1(1110,440) ; U1.2 v1(1205,533.74)
  Bottom Layer w12: U7.2 439.68,714.68 445,720 445,730 440,735 401.34,735 U7.1 400.71,745.71 422.91,767.91 ; C18.1 422.91,767.91 ; C9.1 1472.91,477.09 1410,540 1275,540 1180,635 1180,730 1170,740 775,740 743.19,708.19 671.81,708.19 612.09,767.91 422.91,767.91 ; C9.1@1515.43,479.57 v1(1577.92,479.57) 1594.49,462.99 J1.1@1654.68,462.99
pads on no net: J1.4 MH1. MH2. MH3. MH4. S1. S2.2 S2.4 S3. S3.3 U1.21 U1.22 U1.25 U1.26 U1.27 U1.36 U1.37 U1.38 U1.39 U1.40 U1.41 U2.3 U3.3 U3.8 U3.9 U3.11 U3.12 U4.7 U6.1 U6.8 U6.@716,175.69 U6.@722.38,7.03 U6.@840.02,492.62 U6.@1029,492.62 U6.@1137.26,120.57 U6.@1152.03,244.59 U6.@1154,4.43 U7.7 U8.6 X1.2 X1.4

## Polygon pours and split planes (outlines as drawn)
GND on Top Layer "Top Layer-GND" (solid, pour order 6): -125,925 1995,925 1995,-125 -125,-125 -125,925
GND on Bottom Layer "Bottom Layer-GND" (solid, remove dead copper, pour order 8): -145.02,945.85 1974.98,945.85 1974.98,-104.15 -145.02,-104.15 -145.02,945.85

## Keep-outs
Keep-Out Layer:
  the board outline again, w10

## Other copper
Top Layer:
  region: 697 vertices and 0 holes, not listed, extent 128.69,-57.74 263.28,66.67
  text "@mikerankin" at -85,585 h40 r270
Bottom Layer:
  pour cut-out: 404.84,-72.32 464.84,-72.32 464.84,22.68 404.84,22.68

## Silkscreen, mask and mechanical layers (free items; w line width, h text height)
Top Overlay:
  text "LiPo" at 85,895 h40 r270
  text "D13" at 1465,795 h30
  text "-" at 165,730 h60
  text "+" at 268.58,729.69 h60
Bottom Overlay:
  lines w25: 1460,-85 1495,-85 1525,-55 1525,-20
  text "ON" at 370,900 h30 r90
  text "OFF" at 660,900 h30 r90
  text "LiPo" at 145,895 h40 r90
  text "-" at 165,755 h60
  text "+" at 270,755 h60
  text "RESET" at 1595,300 h30 r90
  text "Rev2.3" at 1740,-85 h30
Top Solder:
  text "@mikerankin" at -85,585 h40 r270
Board Outline:
  the board outline again, w10
Bottom Assembly:
  lines w4: 1024,357 820,357 820,559 1026,559 1026,357 ; 471,667 604,667 604,734 471,734 471,667
  text "X2" at 550,691 h20
  text "U1" at 933,446 h20
Top Assembly:
  lines w4: 1325,215 1325,327 1384,327 1384,215 1325,215
  text "D1" at 1344,281 h20 r270

## Text inside footprints (layer, text, board x,y; h text height)
J1: Bottom Assembly "PCB EDGE" at 1935.69,283.99 h30 r270
S3: Top Overlay "ON" at 385,775 h30 r270; Top Overlay "OFF" at 665,775 h30 r270